# Altium PCB STM32 PCB.PcbDoc (part 1 of 2)
Units mm, origin at the board's own origin, x right, y up, seen from the top; angles counter-clockwise.
Board outline 53.53 x 23.03 mm, 2 copper layers (Top Layer, Bottom Layer); 33 components, 50 nets, 169 pads, 215 vias.
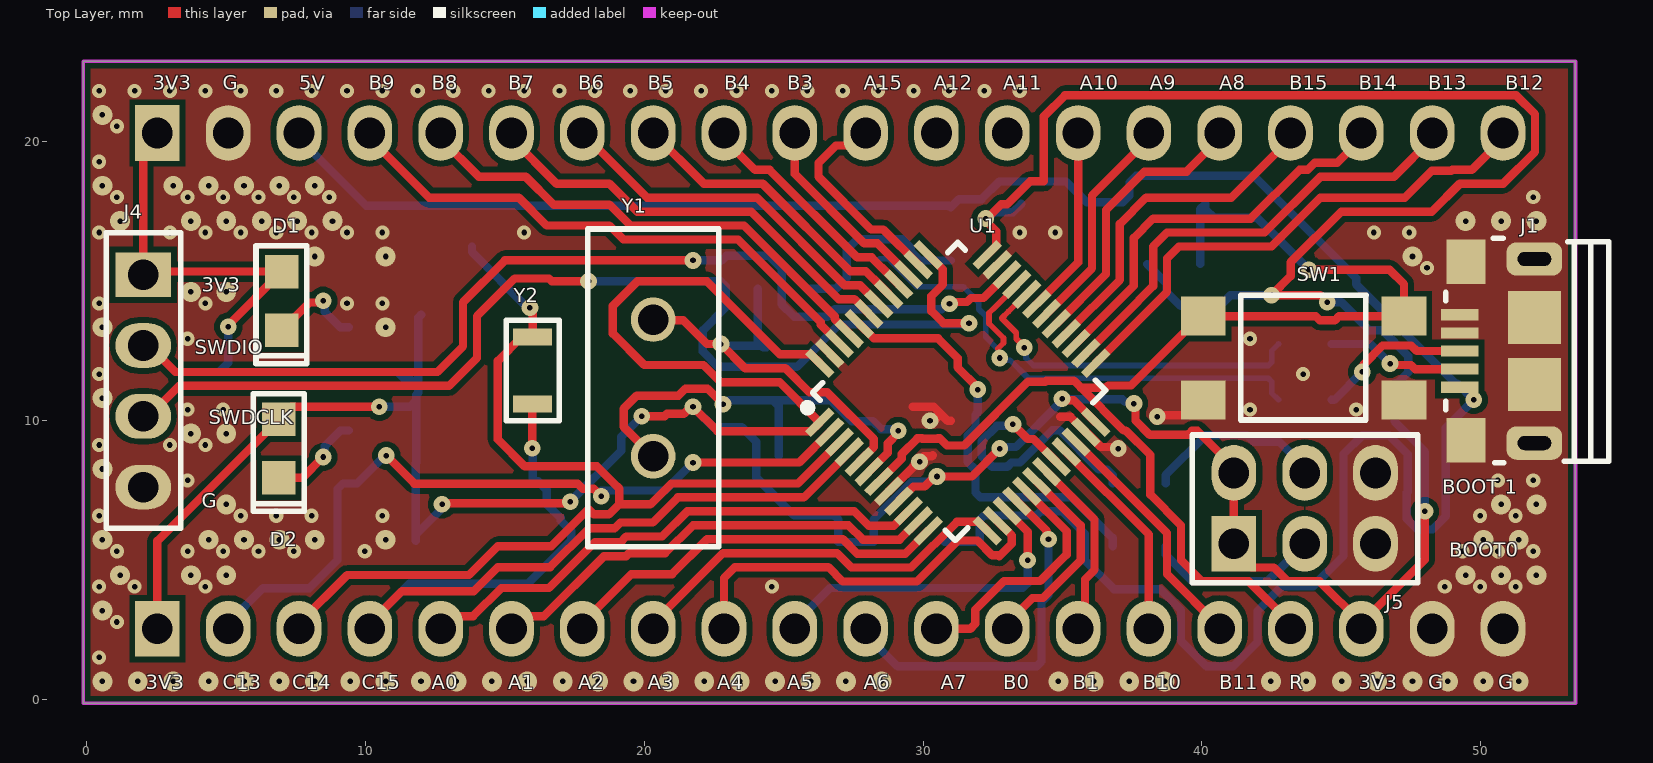
[diagram p0: Top Layer view]
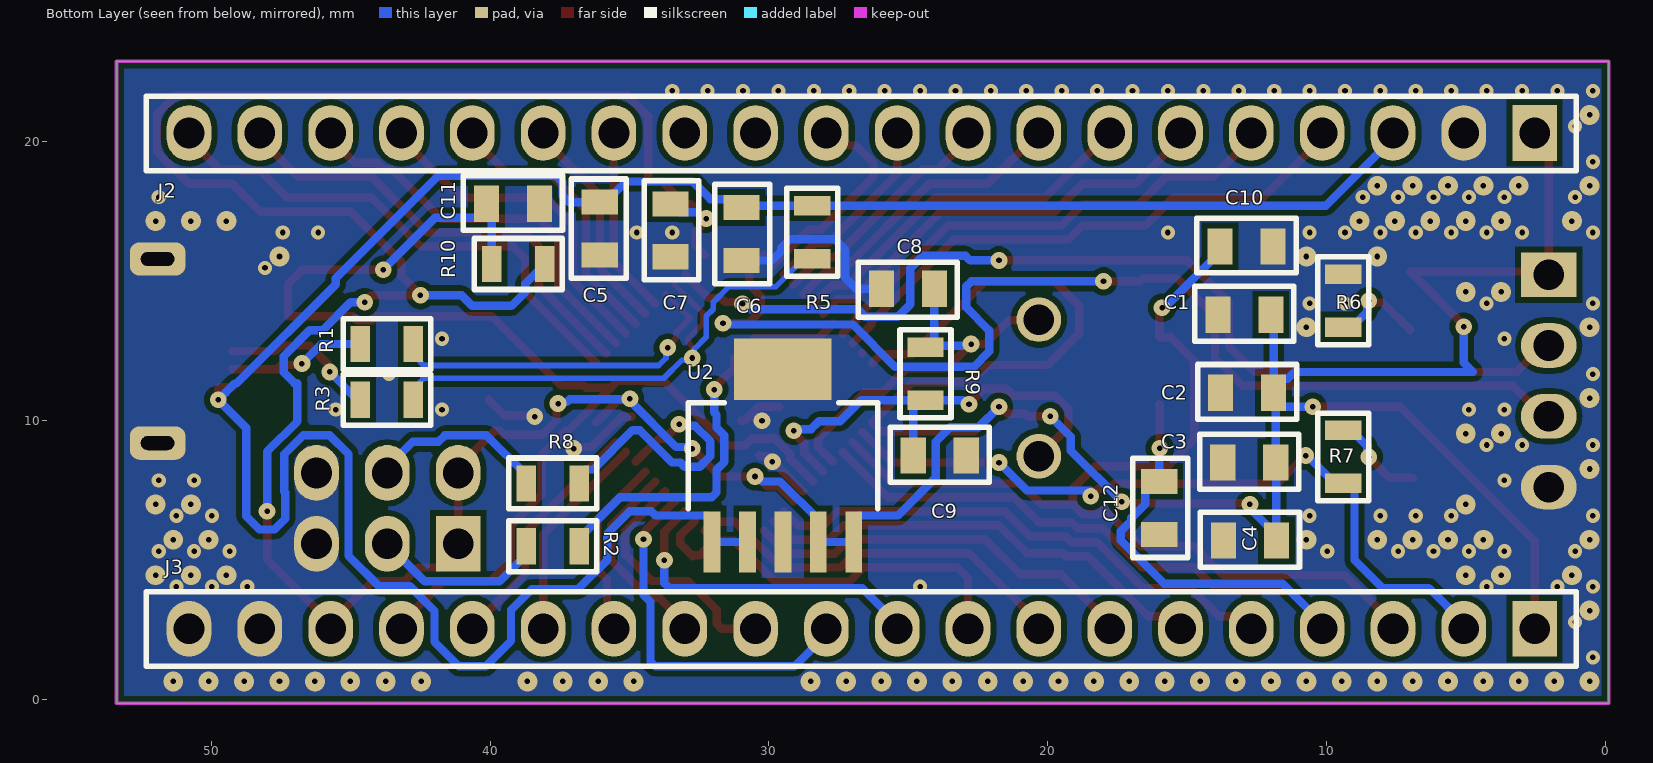
[diagram p1: Bottom Layer view, seen from below]
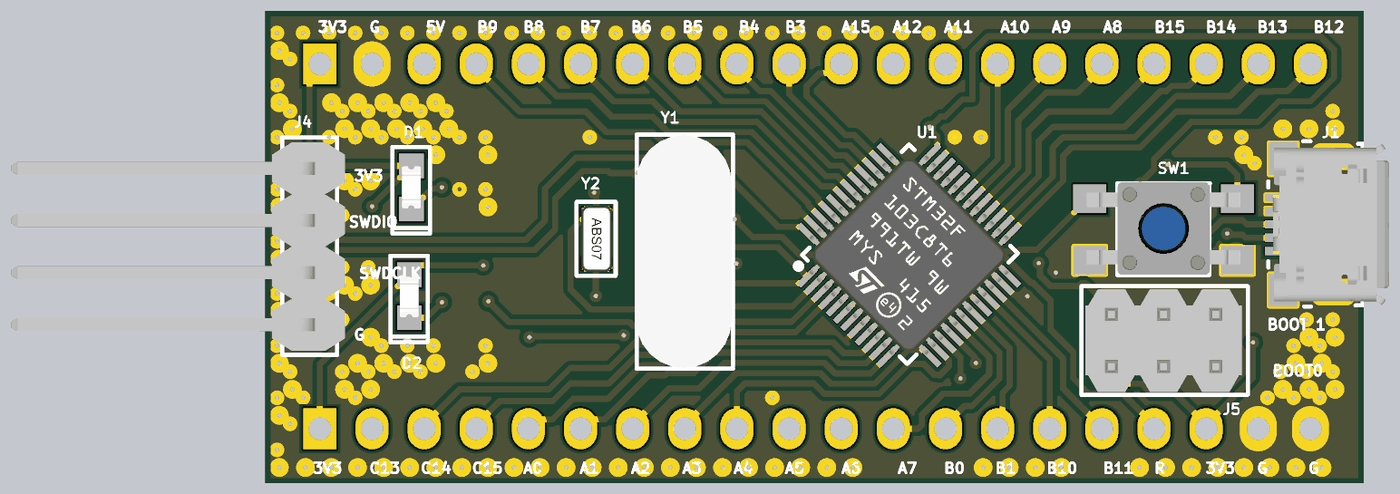
[diagram p2: 3D render of the assembled board from above, using the file's embedded part models]
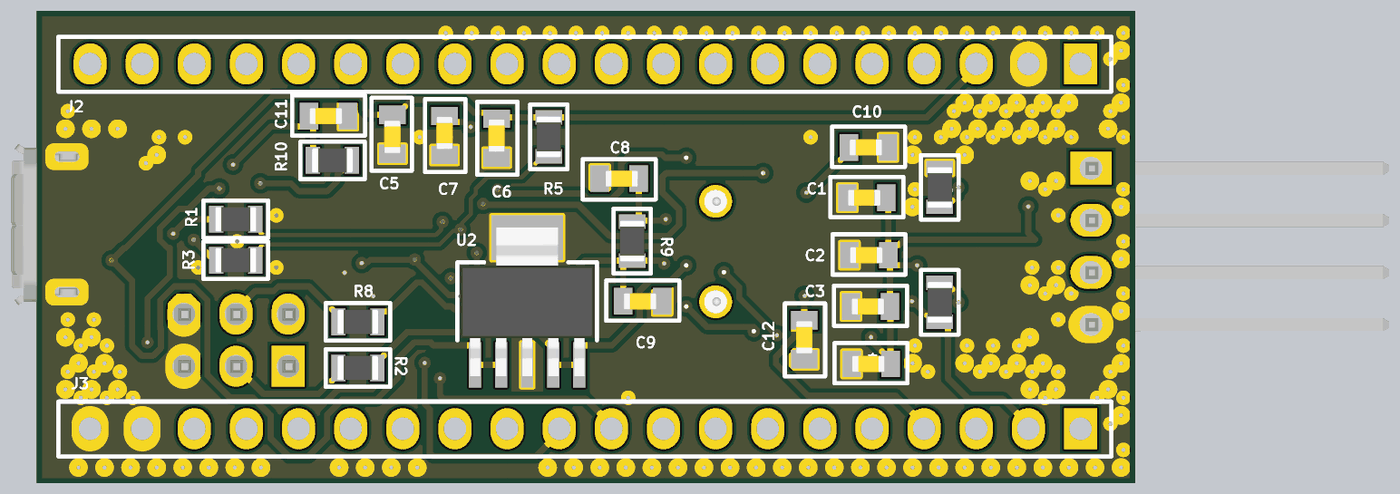
[diagram p3: 3D render of the assembled board from below, using the file's embedded part models]

## Layer stack, top to bottom
Top Solder: solder mask 0.0102, Solder Resist, Dk 3.5
Top Layer: signal copper 0.0356
Dielectric 1: dielectric 0.32, FR-4, Dk 4.8
Bottom Layer: signal copper 0.0356
Bottom Solder: solder mask 0.0102, Solder Resist, Dk 3.5

## Board outline
-0.127,-0.127 53.4,-0.127 53.4,22.9 -0.127,22.9

## Design rules (kind name [scope] priority, off if disabled: settings)
Clearance [All] p1: gap=0.2 ignorepadtopadclearanceinfootprint=FALSE
ComponentClearance [All] p1: gap=0.2 collisioncheckmode=3 verticalgap=0.2 showdistances=FALSE
DiffPairsRouting DiffPair_90DiffPairsRouting [InDifferentialPairClass('diff_90')] p1: maxlimit=0.254 minlimit=0.254 mostfreqgap=0.254 toplayer_minwidth=0.203 toplayer_maxwidth=0.203 toplayer_prefwidth=0.203 bottomlayer_minwidth=0.203 bottomlayer_maxwidth=0.203 bottomlayer_prefwidth=0.203 maxuncoupledlength=12.7
DiffPairsRouting [All] p2: maxlimit=0.254 minlimit=0.254 mostfreqgap=0.254 toplayer_minwidth=0.381 toplayer_maxwidth=0.381 toplayer_prefwidth=0.381 bottomlayer_minwidth=0.381 bottomlayer_maxwidth=0.381 bottomlayer_prefwidth=0.381 maxuncoupledlength=12.7
HoleSize [All] p1: absolutevalues=TRUE maxlimit=10 minlimit=0.2 maxpercent=80.000 minpercent=20.000
HoleToHoleClearance [All] p1: gap=0.3 allowstackedmicrovias=TRUE
MatchedLengths DiffPair_90MatchedLengths [InDifferentialPairClass('diff_90')] p1: tolerance=25.4 checknetsindiffpair=FALSE checkdiffpairvsdiffpair=TRUE checkxsignals=TRUE checkothers=TRUE
MinimumSolderMaskSliver [All] p1: minsoldermaskwidth=0.1
PolygonConnect [All] p1: connectstyle=Direct reliefconductorwidth=0.254 reliefentries=4 polygonreliefangle="90 Angle" airgapwidth=0.254
RoutingVias [All] p1: holewidth=0.3 width=0.6 viastyle="Through Hole" minholewidth=0.1 minwidth=0.2 maxholewidth=0.3 maxwidth=7
SilkToSilkClearance [All] p1: silktosilkclearance=0.1
SilkToSolderMaskClearance [IsPad] p1: minsilkscreentomaskgap=0.1 clearancetoexposedcopper=TRUE
SolderMaskExpansion [All] p1: expansion=0.1 istentingtop=FALSE
Width [All] p1: maxlimit=0.5 minlimit=0.3 preferedwidth=0.3
23 further rules are at their usual default settings.

## Classes and differential pairs
differential pair class diff_90: D
differential pair D: +D_P -D_N

## Components (designator, comment, footprint, x,y, rotation, side; value= is the part's Value field where it differs from the comment)
C1 "10uF" CAP_100_NF 13.077,13.8 r0 bottom
C2 "10uF" CAP_100_NF 12.977,11 r0 bottom
C3 "10uF" CAP_100_NF 12.9,8.5 r0 bottom
C4 "10uF" CAP_100_NF 12.877,5.7 r0 bottom
C5 "10uF" CAP_100_NF 36.068,16.764 r270 bottom
C6 "10uF" CAP_100_NF 30.988,16.825 r90 bottom
C7 "10uF" CAP_100_NF 33.528,16.957 r90 bottom
C8 "22pF" CAP_100_NF 24.892,14.732 r180 bottom
C9 "22pF" CAP_100_NF 24,8.75 r0 bottom
C10 "22pF" CAP_100_NF 13,16.25 r0 bottom
C11 "100_nf" CAP_100_NF 39.309,17.78 r0 bottom
C12 "22pF" CAP_100_NF 16,7 r90 bottom
D1 "red" LED_RED_0805 7,14.3 r90 top
D2 "red" LED_RED_0805 6.9,9 r90 top
J1 "10118193-0001LF" USB 49.25,11.2 r90 top
J2 "PRPC020SACN-RC" "HDR MALE 20X1 2.54 MM" 2.54,20.32 r270 bottom
J3 "PRPC020SACN-RC" "HDR MALE 20X1 2.54 MM" 2.54,2.54 r270 bottom
J4 "PBC04SBEN" "HDR MALE 4X1 2.54 MM" 2.032,15.24 r0 top
J5 "PREC003DFAN-RC" HDR_MALE_3X2_2.54MM 41.148,5.588 r90 top
R1 "22 Ohm" R0805 43.7,12.75 r180 bottom
R2 "10K" R0805 37.75,5.5 r0 bottom
R3 "22 Ohm" R0805 43.7,10.75 r180 bottom
R5 "4.7K" R0805 28.448,16.764 r90 bottom
R6 "1K" R0805 9.4,14.3 r90 bottom
R7 "1K" R0805 9.4,8.7 r90 bottom
R8 "10K" R0805 37.75,7.75 r0 bottom
R9 "10 M Ohm" R0805 24.384,11.684 r270 bottom
R10 "10K" R0805 38.989,15.621 r180 bottom
SW1 "TL3305AF160QG" SW_PB_SMD 43.65,12.25 r180 top
U1 "STM32F103C8T6" STM32F103C8T6 31.245,11.004 r45 top
U2 "TL1963A-33DCQR" DCQR_PDSO_G6 29.5,8.75 r90 bottom
Y1 "ECS-80-20-4X" XTAL_8_MHZ 20.32,11.176 r270 top
Y2 "ABS07-32.768KHZ-6-T" "XTAL_32.768 KHZ_SMD" 16,11.8 r270 top

## Footprints (in the part's own frame and the unit in brackets; to place one, negate y for a bottom-side part, rotate by r counter-clockwise, add the part's x,y. Pads: shape width x height; smd on the part's side, far side on the other; paste and mask are expansions set on the pad)
CAP_100_NF [mm]
  rect 0.9x1.3 smd: 1(-1.077,0) 2(0.823,0)
  silkscreen extent -1.9,-1.02 1.65,0.95, body extent -0.8,-0.4 0.8,0.4, height 0.87
DCQR_PDSO_G6 [mm]
  rect 2.2x0.6 smd: 1(-3.1,2.54) 2(-3.1,1.27) 3(-3.1,0) 4(-3.1,-1.27) 5(-3.1,-2.54)
  rect 2.2x3.5 smd: 6(3.1,0)
  silkscreen extent -1.9,-3.4 1.9,3.4, body extent -3.66,-3.27 3.6,3.27, height 1.81
"HDR MALE 4X1 2.54 MM" [mm]
  rect 2x1.6 hole 1.1: 1(0,0)
  oval 2x1.6 hole 1.1: 2(0,-2.54) 3(0,-5.08) 4(0,-7.62)
  silkscreen extent -1.33,-9.1 1.35,1.5, body extent -14.53,-8.9 1.73,1.26, height 4.39
"HDR MALE 20X1 2.54 MM" [mm]
  rect 2x1.6 hole 1.1: 1(0,0)
  oval 2x1.6 hole 1.1: 2(0,-2.54) 3(0,-5.08) 4(0,-7.62) 5(0,-10.16) 6(0,-12.7) 7(0,-15.24) 8(0,-17.78) 9(0,-20.32) 10(0,-22.86) 11(0,-25.4) 12(0,-27.94) 13(0,-30.48) 14(0,-33.02) 15(0,-35.56) 16(0,-38.1) 17(0,-40.64) 18(0,-43.18) 19(0,-45.72) 20(0,-48.26)
  silkscreen extent -1.33,-49.8 1.35,1.5, body extent -1.14,-49.5 1.4,1.3, height 10.64
HDR_MALE_3X2_2.54MM [mm]
  rect 2x1.6 hole 1.1: 1(0,0)
  oval 2x1.6 hole 1.1: 2(0,-2.54) 3(0,-5.08) 4(2.54,-5.08) 5(2.54,-2.54) 6(2.54,0)
  silkscreen extent -1.4,-6.6 3.9,1.5, body extent -1.25,-6.31 3.75,1.31, height 10.59
LED_RED_0805 [mm]
  rect 1.2x1.2 smd: 1(-1.05,0) 2(1.05,0)
  silkscreen extent -2.25,-0.9 1.97,0.92, body extent -1.03,-0.45 1.03,0.46, height 1.1
R0805 [mm]
  rect 0.7x1.3 smd: 1(-0.95,0) 2(0.95,0)
  silkscreen extent -1.57,-0.91 1.57,0.91, body extent -1,-0.6 1,0.6, height 0.71
STM32F103C8T6 [mm]
  rect 1.2x0.3 smd paste+0 mask+0.05: 1(-4.25,2.75) 2(-4.25,2.25) 3(-4.25,1.75) 4(-4.25,1.25) 5(-4.25,0.75) 6(-4.25,0.25) 7(-4.25,-0.25) 8(-4.25,-0.75) 9(-4.25,-1.25) 10(-4.25,-1.75) 11(-4.25,-2.25) 12(-4.25,-2.75) 25(4.25,-2.75) 26(4.25,-2.25) 27(4.25,-1.75) 28(4.25,-1.25) 29(4.25,-0.75) 30(4.25,-0.25) 31(4.25,0.25) 32(4.25,0.75) 33(4.25,1.25) 34(4.25,1.75) 35(4.25,2.25) 36(4.25,2.75)
  rect 0.3x1.2 smd paste+0 mask+0.05: 13(-2.75,-4.25) 14(-2.25,-4.25) 15(-1.75,-4.25) 16(-1.25,-4.25) 17(-0.75,-4.25) 18(-0.25,-4.25) 19(0.25,-4.25) 20(0.75,-4.25) 21(1.25,-4.25) 22(1.75,-4.25) 23(2.25,-4.25) 24(2.75,-4.25) 37(2.75,4.25) 38(2.25,4.25) 39(1.75,4.25) 40(1.25,4.25) 41(0.75,4.25) 42(0.25,4.25) 43(-0.25,4.25) 44(-0.75,4.25) 45(-1.25,4.25) 46(-1.75,4.25) 47(-2.25,4.25) 48(-2.75,4.25)
  silkscreen extent -4.32,-3.68 3.81,3.81, body extent -4.5,-4.5 4.5,4.5, height 1.55
SW_PB_SMD [mm]
  rect 1.6x1.4 smd: 1(-3.6,1.5) 2(3.6,1.5) 3(-3.6,-1.5) 4(3.6,-1.5)
  silkscreen extent -2.25,-2.25 2.25,2.22, body extent -3.75,-2.3 3.75,2.2, height 4
USB [mm]
  rect 0.4x1.35 smd mask+0.05: 1(0,0) 2(0.65,0) 3(1.3,0) 4(1.95,0) 5(2.6,0)
  rect 1.6x1.4 smd: 6(-1.9,-0.225) 7(4.5,-0.225)
  rrect60% 1.2x2 hole 0.5 slot 1.2 at 90 deg mask+0.05: 8(-2,-2.675) 9(4.6,-2.675)
  rect 1.9x1.9 smd: 10(0.1,-2.675) 11(2.5,-2.675)
  silkscreen extent -2.7,-5.35 5.35,0.5, body extent -2.63,-5.38 5.23,0.28, height 2.87
XTAL_8_MHZ [mm]
  round 1.6 / inner round 1 / far side round 1.6 hole 1.1: 1(-2.45,0) 2(2.45,0)
  silkscreen extent -5.7,-2.35 5.7,2.35, body extent -5.68,-2.37 5.68,2.27, height 4.01
"XTAL_32.768 KHZ_SMD" [mm]
  rect 0.6x1.4 smd: 1(-1.2,0) 2(1.2,0)
  silkscreen extent -1.8,-0.95 1.8,0.95, body extent -1.61,-0.73 1.61,0.79, height 0.92

## Part data
C1 C2 C3 C4 C5 C6 C7: library part "CAP 10 UF", "Cap Ceramic 10uF 16V X7S 10% Pad SMD 0805 Soft Termination 125C Automotive T/R", Manufacturer=Samsung, Manufacturer Part Number=CL21Y106KOQ4PNE, Supplier Part Number 1=1276-CL21Y106KOQ4PNECT-ND, Category="Ceramic Capacitors", Pricing 1="1=0.50000, 10=0.34800, 50=0.24340, 100=0.20860, 500=0.15646, 1000=0.13213 (USD)", RoHS=Yes, RoHS Compliant=Yes, Stock 1=1111, Supplier 1=Digi-Key
C8 C9 C10 C12: library part CAP_22pF, "Cap Ceramic 22pF 50V C0G 0.25pF SMD 0805 125°C Paper T/R", Case Code (Imperial)=0805, Case Code (Metric)=2012, Dielectric=C0G, Dielectric Material=Ceramic, Manufacturer=KEMET, Manufacturer Part Number=C0805C220C5GACTU, Max Operating Temperature=125°C, Min Operating Temperature=-55°C, Package Quantity=4000, Supplier Part Number 1=80-C0805C220C5G, Voltage Rating=50V, Capacitance=22pF, Case/Package=0805, Category="Ceramic Capacitors", ComponentLink1Description=https://datasheet.ciiva.com/5420/kem-c1003-c0g-smd-356956-5420078.pdf?src-supplier=Mouser, ComponentLink1URL=https://datasheet.ciiva.com/5420/kem-c1003-c0g-smd-356956-5420078.pdf?src-supplier=Mouser, Dissipation Factor=0.1%, Height=0.78mm, Lead Free="Lead Free", Lead Pitch=0.75mm, Length=0.079inch, Mount="Surface Mount", Packaging="Tape and Reel", Pricing 1="1=0.91000, 10=0.56400, 50=0.56400, 100=0.46200, 1000=0.32200, 10000=0.28100 (USD)", RoHS=Yes, RoHS Compliant=Yes, Series=C0805C, Stock 1=504, Supplier 1=Mouser, Termination=SMD/SMT, Thickness=0.035inch, Voltage Rating (DC)=50V, Width=0.049inch
C11: library part "CAP_ 0.1uf", "Cap Ceramic 0.1uF 50V X7R 10% SMD 0805 125°C Blister Plastic T/R", Capacitance=100nF, Case Code (Imperial)=0805, Case Code (Metric)=2012, Dielectric=X7R, Manufacturer=TDK, Manufacturer Part Number=C2012X7R1H104K125AE, Max Operating Temperature=125°C, Min Operating Temperature=-55°C, Package Quantity=2000, Supplier Part Number 1=810-C2012X7R1H104KAE, Tolerance=10%, Voltage Rating=50V, Case/Package=0805, Category="Ceramic Capacitors", ComponentLink1Description=https://datasheet.ciiva.com/29534/mlcc-commercial-soft-en-29534235.pdf?src-supplier=Digi-Key, ComponentLink1URL=https://datasheet.ciiva.com/29534/mlcc-commercial-soft-en-29534235.pdf?src-supplier=Digi-Key, Features="Soft Termination", Height=1.25mm, Length=0.079inch, Mount="Surface Mount", Packaging="Tape and Reel", Pricing 1="1=0.25000, 10=0.11500, 50=0.11500, 100=0.09800, 1000=0.06100, 10000=0.05200 (USD)", RoHS=Yes, RoHS Compliant=Yes, Stock 1=49203, Supplier 1=Mouser, Termination=SMD/SMT, Thickness=0.057inch, Voltage Rating (DC)=50V, Weight=0.000194oz, Width=0.049inch
D1 D2: library part LED_RED, "Led SMT Red 0805 Tape", Case Code (Imperial)=0805, Case Code (Metric)=2012, Color=Red, Forward Current=25mA, Forward Voltage=2.5V, Lens Color=White, Manufacturer="Osram Opto", Manufacturer Part Number=LSR976-NR-1, Max Operating Temperature=85°C, Min Operating Temperature=-30°C, Package Quantity=16000, Power Dissipation=65mW, Reverse Voltage=12V, Supplier Part Number 1=Q62702P5178, Test Current=20mA, Case/Package=0805, Category=LEDs, ComponentLink1Description=https://datasheet.ciiva.com/4688/o-ls-ly-r976-24152-4688435.pdf?src-supplier=Mouser, ComponentLink1URL=https://datasheet.ciiva.com/4688/o-ls-ly-r976-24152-4688435.pdf?src-supplier=Mouser, ComponentLink2Description=https://datasheet.ciiva.com/26920/getdatasheetpartid-568367-26920831.pdf?src-supplier=Verical, ComponentLink2URL=https://datasheet.ciiva.com/26920/getdatasheetpartid-568367-26920831.pdf?src-supplier=Verical, ComponentLink3Description=https://datasheet.ciiva.com/2112/00078896-0-2112782.pdf?src-supplier=Digi-Key, ComponentLink3URL=https://datasheet.ciiva.com/2112/00078896-0-2112782.pdf?src-supplier=Digi-Key, ComponentLink4Description=https://datasheet.ciiva.com/2112/00078896-0-2112781.pdf?src-supplier=Digi-Key, ComponentLink4URL=https://datasheet.ciiva.com/2112/00078896-0-2112781.pdf?src-supplier=Digi-Key, ComponentLink5Description=https://datasheet.ciiva.com/2112/00078896-0-2112783.pdf?src-supplier=Digi-Key, ComponentLink5URL=https://datasheet.ciiva.com/2112/00078896-0-2112783.pdf?src-supplier=Digi-Key, Depth=1.35mm, Dominant Wavelength=633nm, Height=0.9mm, Illumination Color=Red, Length=2.1mm, Lens Size=1.25mm, Lens Style=Flat,Diffused,Colorless,Rectangular, Lens Transparency=Diffused, Luminous Flux=0.47lm, Luminous Intensity=180mcd, Mount="Surface Mount", Number of Elements=1, Number of LEDs=1, Number of Pins=2, Packaging="Tape and Reel", Pricing 1="4000=0.03250, 8000=0.03167, 16000=0.03084, 24000=0.03002, 32000=0.02919, 40000=0.02836, 400000=0.02753 (USD)", Radiation Hardening=No, RoHS=Yes, RoHS Compliant=Yes, Series="CHIPLED 0805", Stock 1=360000, Supplier 1=Avnet, Viewing Angle=160°, Width=1.25mm
J1: library part Micro_USB, "FCI Right Angle Surface Mount Mount Female USB Connector; 100 V ac; 1.8A", Manufacturer="Amphenol ICC / FCI", Supplier Part Number 1=8632989, Category="USB Connectors", ComponentLink1Description=http://uk.rs-online.com/webdocs/1450/0900766b814507f1.pdf?src-supplier=RSComponents, ComponentLink1URL=http://uk.rs-online.com/webdocs/1450/0900766b814507f1.pdf?src-supplier=RSComponents, ComponentLink2Description=http://www.amphenol-icc.com/media/wysiwyg/files/drawing/10118193.pdf?src-supplier=Digi-Key, ComponentLink2URL=http://www.amphenol-icc.com/media/wysiwyg/files/drawing/10118193.pdf?src-supplier=Digi-Key, ComponentLink3Description=https://cdn.amphenol-icc.com/media/wysiwyg/files/documentation/datasheet/inputoutput/io_usb_micro.pdf?src-supplier=Digi-Key, ComponentLink3URL=https://cdn.amphenol-icc.com/media/wysiwyg/files/documentation/datasheet/inputoutput/io_usb_micro.pdf?src-supplier=Digi-Key, ComponentLink4Description=https://cdn.amphenol-icc.com/media/wysiwyg/files/documentation/datasheet/inputoutput/io_usb_micro.pdf?src-supplier=Mouser, ComponentLink4URL=https://cdn.amphenol-icc.com/media/wysiwyg/files/documentation/datasheet/inputoutput/io_usb_micro.pdf?src-supplier=Mouser, ComponentLink5Description=https://cdn.amphenol-icc.com/media/wysiwyg/files/documentation/datasheet/inputoutput/io_usb_micro.pdf?src-supplier=Onlinecomponents.com, ComponentLink5URL=https://cdn.amphenol-icc.com/media/wysiwyg/files/documentation/datasheet/inputoutput/io_usb_micro.pdf?src-supplier=Onlinecomponents.com, ComponentLink6Description=https://cdn.amphenol-icc.com/media/wysiwyg/files/documentation/datasheet/inputoutput/io_usb_micro.pdf?src-supplier=Allied+Electronics, ComponentLink6URL=https://cdn.amphenol-icc.com/media/wysiwyg/files/documentation/datasheet/inputoutput/io_usb_micro.pdf?src-supplier=Allied+Electronics, ComponentLink7Description=https://cdn.amphenol-icc.com/media/wysiwyg/files/documentation/datasheet/inputoutput/io_usb_micro.pdf?src-supplier=RSComponents, ComponentLink7URL=https://cdn.amphenol-icc.com/media/wysiwyg/files/documentation/datasheet/inputoutput/io_usb_micro.pdf?src-supplier=RSComponents, ComponentLink8Description=https://cdn.amphenol-icc.com/media/wysiwyg/files/documentation/datasheet/inputoutput/io_usb_micro.pdf?src-supplier=Verical, ComponentLink8URL=https://cdn.amphenol-icc.com/media/wysiwyg/files/documentation/datasheet/inputoutput/io_usb_micro.pdf?src-supplier=Verical, ComponentLink9Description=https://cdn.amphenol-icc.com/media/wysiwyg/files/documentation/datasheet/inputoutput/io_usb_micro.pdf?src-supplier=Avnet, ComponentLink9URL=https://cdn.amphenol-icc.com/media/wysiwyg/files/documentation/datasheet/inputoutput/io_usb_micro.pdf?src-supplier=Avnet, ComponentLink10Description=https://cdn.amphenol-icc.com/media/wysiwyg/files/documentation/datasheet/inputoutput/io_usb_micro.pdf?src-supplier=Arrow+Electronics, ComponentLink10URL=https://cdn.amphenol-icc.com/media/wysiwyg/files/documentation/datasheet/inputoutput/io_usb_micro.pdf?src-supplier=Arrow+Electronics, ComponentLink11Description=https://cdn.amphenol-icc.com/media/wysiwyg/files/documentation/datasheet/inputoutput/io_usb_micro.pdf?src-supplier=TTI, ComponentLink11URL=https://cdn.amphenol-icc.com/media/wysiwyg/files/documentation/datasheet/inputoutput/io_usb_micro.pdf?src-supplier=TTI, ComponentLink12Description=https://cdn.amphenol-icc.com/media/wysiwyg/files/documentation/datasheet/inputoutput/io_usb_micro.pdf?src-supplier=Heilind+Electronics, ComponentLink12URL=https://cdn.amphenol-icc.com/media/wysiwyg/files/documentation/datasheet/inputoutput/io_usb_micro.pdf?src-supplier=Heilind+Electronics, ComponentLink13Description=https://cdn.amphenol-icc.com/media/wysiwyg/files/documentation/datasheet/inputoutput/io_usb_micro.pdf?src-supplier=TME, ComponentLink13URL=https://cdn.amphenol-icc.com/media/wysiwyg/files/documentation/datasheet/inputoutput/io_usb_micro.pdf?src-supplier=TME, Manufacturer Part Number=10118193-0001LF, Pricing 1="100=0.34100, 500=0.29900, 1000=0.25600, 2500=0.23900, 5000=0.22100 (USD)", RoHS=No, Stock 1=3200, Supplier 1=RSComponents
J2 J3: library part MALE_HEADER_20X1, "Conn Header Vert 20POS 2.54MM", Color=Black, Manufacturer=Sullins, Package Quantity=1, Supplier Part Number 1=S1131EC-20-ND, Category=Connectors, ComponentLink1Description=https://datasheet.ciiva.com/741/xrxczzzsxxn-rc-st-11635-b-741945.pdf?src-supplier=Digi-Key, ComponentLink1URL=https://datasheet.ciiva.com/741/xrxczzzsxxn-rc-st-11635-b-741945.pdf?src-supplier=Digi-Key, Connector Type="Male Pin", Contact Mating Length=0.23inch, Contact Plating=Gold, Contact Type="Male Pin", Manufacturer Part Number=PRPC020SACN-RC, Mount="Through Hole", Number of Positions=20, Number of Rows=1, Packaging=Bulk, Pitch=0.1inch, Pricing 1="1=0.67000, 10=0.62800, 25=0.56520, 50=0.50260, 100=0.48160, 250=0.43976, 500=0.41880 (USD)", RoHS=Yes, RoHS Compliant=Yes, Series=-, Stock 1=612, Supplier 1=Digi-Key, Termination=Solder
J4: library part HDR_MALE_4X1, "Conn Header R/a 4POS 2.54MM", Color=Black, Manufacturer=Sullins, Package Quantity=1, Supplier Part Number 1=S1151E-04-ND, Category=Connectors, ComponentLink1Description=http://www.sullinscorp.com/catalogs/77_PAGE108-109_.100_MALE_HDR.pdf?src-supplier=Digi-Key, ComponentLink1URL=http://www.sullinscorp.com/catalogs/77_PAGE108-109_.100_MALE_HDR.pdf?src-supplier=Digi-Key, Connector Type="Male Pin", Contact Material=Bronze, Contact Mating Length=0.23inch, Contact Plating=Gold, Contact Type="Male Pin", Gender=Male, Height=3.56mm, Housing Color=Black, Housing Material=Plastic, Lead Free="Lead Free", Length=10.2mm, Manufacturer Part Number=PBC04SBEN, Mount="Through Hole", Number of Contacts=4, Number of Positions=4, Number of Rows=1, Packaging=Bulk, Pitch=0.1inch, Pricing 1="1=0.84000, 10=0.73800, 25=0.69440, 50=0.66540, 100=0.63650, 250=0.57868, 500=0.52080 (USD)", RoHS=Yes, RoHS Compliant=Yes, Stock 1=668, Supplier 1=Digi-Key, Termination=Solder, Width=2.54mm
J5: library part HDR_MALE_3X2, "Conn Header Vert 6POS 2.54MM", Color=Black, Manufacturer=Sullins, Package Quantity=1, Supplier Part Number 1=S2212EC-03-ND, Category=Connectors, ComponentLink1Description=https://datasheet.ciiva.com/741/xrxczzzdxxn-rc-11636-b-741002.pdf?src-supplier=Digi-Key, ComponentLink1URL=https://datasheet.ciiva.com/741/xrxczzzdxxn-rc-11636-b-741002.pdf?src-supplier=Digi-Key, Connector Type="Male Pin", Contact Mating Length=0.318inch, Contact Plating=Tin, Contact Type="Male Pin", Manufacturer Part Number=PREC003DFAN-RC, Mount="Through Hole", Number of Positions=6, Number of Rows=2, Packaging=Bulk, Pitch=0.1inch, Pricing 1="1=0.16000, 10=0.15100, 25=0.12920, 50=0.11280, 100=0.10480, 250=0.09272, 500=0.08870 (USD)", RoHS=Yes, RoHS Compliant=Yes, Row Spacing=0.1inch, Stock 1=4091, Supplier 1=Digi-Key, Termination=Solder
R1 R3: library part "Res 22Ohm", "贴片电阻 22Ω ± 1.00% 0.125W ± 100ppm/℃ 0805", Case Code (Imperial)=0805, Case Code (Metric)=2012, Manufacturer=Yageo, Manufacturer Part Number=RC0805FR-0722RL, Max Operating Temperature=155°C, Max Power Dissipation=125mW, Min Operating Temperature=-55°C, Package Quantity=1, Resistance=22R, Resistance Tolerance=1%, Resistor Type="Thick Film", Supplier Part Number 1=6183987, Temperature Coefficient=100ppm/°C, Voltage Rating=150V, Case/Package=0805, Category="Chip SMD Resistors", ComponentLink1Description=https://datasheet.ciiva.com/11819/0900766b8106beab-11819837.pdf?src-supplier=RSComponents, ComponentLink1URL=https://datasheet.ciiva.com/11819/0900766b8106beab-11819837.pdf?src-supplier=RSComponents, ComponentLink2Description=https://datasheet.ciiva.com/46447/444164-46447574.pdf?src-supplier=Element14, ComponentLink2URL=https://datasheet.ciiva.com/46447/444164-46447574.pdf?src-supplier=Element14, ComponentLink3Description=https://datasheet.ciiva.com/2457/pyu-r-int-thick-7-2457045.pdf?src-supplier=Digi-Key, ComponentLink3URL=https://datasheet.ciiva.com/2457/pyu-r-int-thick-7-2457045.pdf?src-supplier=Digi-Key, ComponentLink4Description=https://datasheet.ciiva.com/2457/pyu-r-int-thick-7-2457046.pdf?src-supplier=Digi-Key, ComponentLink4URL=https://datasheet.ciiva.com/2457/pyu-r-int-thick-7-2457046.pdf?src-supplier=Digi-Key, ComponentLink5Description=https://datasheet.ciiva.com/2457/pyu-r-int-thick-7-2457044.pdf?src-supplier=Digi-Key, ComponentLink5URL=https://datasheet.ciiva.com/2457/pyu-r-int-thick-7-2457044.pdf?src-supplier=Digi-Key, ComponentLink6Description=https://datasheet.ciiva.com/12667/rc0805-12667371.pdf?src-supplier=Mouser, ComponentLink6URL=https://datasheet.ciiva.com/12667/rc0805-12667371.pdf?src-supplier=Mouser, Construction=Rectangular, Depth=1.25mm, Features="Moisture Resistant", Height=0.024inch, Lead Free="Lead Free", Length=0.079inch, Military Standard=Not, Number of Terminations=2, Packaging="Tape and Reel", Power Rating=125mW, Pricing 1="5000=0.01300 (USD)", REACH SVHC=Unknown, RoHS=Yes, RoHS Compliant=Yes, Series=RC, Stock 1=50000, Supplier 1=RSComponents, Technology="THICK FILM", Termination=SMD/SMT, Tolerance=1%, Width=0.049inch, Working Voltage=150V
R2 R8 R10: library part Res_10K, "Res Thin Film 0805 10K Ohm 0.1% 1/8W ±50ppm/°C Molded SMD SMD Paper T/R", Case Code (Imperial)=0805, Case Code (Metric)=2012, Manufacturer=Yageo, Manufacturer Part Number=RT0805BRE0710KL, Max Operating Temperature=125°C, Max Power Dissipation=125mW, Min Operating Temperature=-55°C, Package Quantity=5000, Resistance=10kR, Resistor Type="Thin Film", Supplier Part Number 1=82AH9025, Temperature Coefficient=50ppm/°C, Voltage Rating=150V, Case/Package=0805, Category="Chip SMD Resistors", ComponentLink1Description=https://datasheet.ciiva.com/2591/pyu-rt-1-to-0-05-rohs-l-5-2591441.pdf?src-supplier=Digi-Key, ComponentLink1URL=https://datasheet.ciiva.com/2591/pyu-rt-1-to-0-05-rohs-l-5-2591441.pdf?src-supplier=Digi-Key, ComponentLink2Description=https://datasheet.ciiva.com/12836/pyu-rt-1-to-0-05-rohs-l-4-12836453.pdf?src-supplier=Mouser, ComponentLink2URL=https://datasheet.ciiva.com/12836/pyu-rt-1-to-0-05-rohs-l-4-12836453.pdf?src-supplier=Mouser, Contact Plating=Tin,Matte, Features="Moisture Resistant", Height=0.024inch, Lead Free="Lead Free", Length=0.079inch, Number of Terminations=2, Packaging="Tape and Reel", Power Rating=125mW, Pricing 1="10=0.27000, 25=0.21800, 50=0.16600, 100=0.11400 (USD)", Radiation Hardening=No, RoHS=Yes, RoHS Compliant=Yes, Series=RT, Size Code=0805, Stock 1=9400, Supplier 1=Newark, Termination=SMD/SMT, Voltage Rating (DC)=150V, Weight=0.000194oz, Width=0.049inch
R5: library part "Res 4.7 K", "Res Thick Film 0805 4.7K Ohm 1% 0.125W ±100ppm/°C Molded SMD Paper T/R", Case Code (Imperial)=0805, Case Code (Metric)=2012, Manufacturer="Stackpole Electronics", Manufacturer Part Number=RMCF0805FT4K70, Max Operating Temperature=155°C, Max Power Dissipation=125mW, Min Operating Temperature=-55°C, Resistance=4.7kR, Resistor Type="Thick Film", Temperature Coefficient=100ppm/°C, Tolerance=1%, Case/Package=0805, Category="Chip SMD Resistors", ComponentLink1Description=https://www.seielect.com/Catalog/SEI-RMCF_RMCP.pdf?src-supplier=Digi-Key, ComponentLink1URL=https://www.seielect.com/Catalog/SEI-RMCF_RMCP.pdf?src-supplier=Digi-Key, ComponentLink2Description=https://www.verical.com/server-webapp/html/getDatasheet?partID=409513&src-supplier=Verical, ComponentLink2URL=https://www.verical.com/server-webapp/html/getDatasheet?partID=409513&src-supplier=Verical, ComponentLink3Description=https://www.seielect.com/catalog/SEI-RMCF_RMCP.pdf?src-supplier=Avnet, ComponentLink3URL=https://www.seielect.com/catalog/SEI-RMCF_RMCP.pdf?src-supplier=Avnet, ComponentLink4Description=http://www.seielect.com/catalog/sei-rmc.pdf?src-supplier=Future+Electronics, ComponentLink4URL=http://www.seielect.com/catalog/sei-rmc.pdf?src-supplier=Future+Electronics, ComponentLink5Description=https://www.seielect.com/catalog/SEI-Packaging.pdf?src-supplier=Digi-Key, ComponentLink5URL=https://www.seielect.com/catalog/SEI-Packaging.pdf?src-supplier=Digi-Key, ComponentLink6Description=http://components.arrow.com/part/dataview/44988207S7163511N1174?src-supplier=Arrow+Electronics, ComponentLink6URL=http://components.arrow.com/part/dataview/44988207S7163511N1174?src-supplier=Arrow+Electronics, Construction=Rectangular, Contact Plating=Tin,Matte, Depth=1.25mm, Features="Automotive AEC-Q200", Height=0.026inch, Lead Free="Lead Free", Length=2mm, Military Standard=Not, Mount="Surface Mount", Number of Terminations=2, Packaging="Tape and Reel", Power Rating=125mW, Pricing 1="5000=0.00256, 10000=0.00252, 20000=0.00245, 30000=0.00239, 40000=0.00230, 50000=0.00225, 500000=0.00220 (USD)", Radiation Hardening=No, RoHS=Yes, RoHS Compliant=Yes, Series=RMCF, Size Code=0805, Stock 1=3000000, Supplier 1=Avnet, Supplier Part Number 1=RMCF0805FT4K70, Width=0.049inch
R6 R7: library part Res_1K, "Res Thick Film 0805 1K Ohm 1% 0.125W(1/8W) ±100ppm/C Pad SMD T/R", Case Code (Imperial)=0805, Case Code (Metric)=2012, Manufacturer=Yageo, Manufacturer Part Number=RC0805FR-071KP, Max Operating Temperature=155°C, Max Power Dissipation=125mW, Min Operating Temperature=-55°C, Resistance=1kR, Resistor Type="Thick Film", Supplier Part Number 1=603-RC0805FR-071KP, Temperature Coefficient=100ppm/°C, Tolerance=1%, Case/Package=0805, Category="Chip SMD Resistors", ComponentLink1Description=http://www.yageo.com.tw/exep/pages/download/literatures/PYu-R_INT-thick_7.pdf?src-supplier=Digi-Key, ComponentLink1URL=http://www.yageo.com.tw/exep/pages/download/literatures/PYu-R_INT-thick_7.pdf?src-supplier=Digi-Key, ComponentLink2Description=http://www.yageo.com/NewPortal/yageodocoutput?fileName=/pdf/R-Chip/PYu-RC_51_RoHS_P_0.pdf&src-supplier=Digi-Key, ComponentLink2URL=http://www.yageo.com/NewPortal/yageodocoutput?fileName=/pdf/R-Chip/PYu-RC_51_RoHS_P_0.pdf&src-supplier=Digi-Key, Features="Moisture Resistant", Height=0.024inch, Length=0.079inch, Number of Terminations=2, Packaging="Tape and Reel", Pricing 1="1=0.22000, 10=0.07500, 50=0.07500, 100=0.03100, 1000=0.01400, 10000=0.00900 (USD)", RoHS=Yes, RoHS Compliant=Yes, Stock 1=2868, Supplier 1=Mouser, Width=0.049inch
R9: library part "Res_10 M_Ohm", "贴片电阻 10000000Ω ± 1.00% 0.125W ± 100ppm/℃ 0805", Case Code (Imperial)=0805, Case Code (Metric)=2012, Manufacturer=Yageo, Manufacturer Part Number=RC0805FR-0710ML, Max Operating Temperature=155°C, Max Power Dissipation=125mW, Min Operating Temperature=-55°C, Resistance=10MR, Resistance Tolerance=1%, Resistor Type="Thick Film", Supplier Part Number 1=603-RC0805FR-0710ML, Temperature Coefficient=100ppm/°C, Voltage Rating=150V, Case/Package=0805, Category="Chip SMD Resistors", ComponentLink1Description=https://datasheet.ciiva.com/11819/0900766b8106beab-11819794.pdf?src-supplier=RSComponents, ComponentLink1URL=https://datasheet.ciiva.com/11819/0900766b8106beab-11819794.pdf?src-supplier=RSComponents, ComponentLink2Description=https://datasheet.ciiva.com/46447/444164-46447564.pdf?src-supplier=Element14, ComponentLink2URL=https://datasheet.ciiva.com/46447/444164-46447564.pdf?src-supplier=Element14, ComponentLink3Description=https://datasheet.ciiva.com/12667/rc0805-12667934.pdf?src-supplier=Mouser, ComponentLink3URL=https://datasheet.ciiva.com/12667/rc0805-12667934.pdf?src-supplier=Mouser, ComponentLink4Description=https://datasheet.ciiva.com/7941/444164-7941686.pdf?src-supplier=Element14, ComponentLink4URL=https://datasheet.ciiva.com/7941/444164-7941686.pdf?src-supplier=Element14, ComponentLink5Description=https://datasheet.ciiva.com/7941/444164-7941685.pdf?src-supplier=Element14, ComponentLink5URL=https://datasheet.ciiva.com/7941/444164-7941685.pdf?src-supplier=Element14, ComponentLink6Description=https://datasheet.ciiva.com/16741/rc0805-16741023.pdf?src-supplier=Future+Electronics, ComponentLink6URL=https://datasheet.ciiva.com/16741/rc0805-16741023.pdf?src-supplier=Future+Electronics, Construction=Rectangular, Depth=1.25mm, Features="Moisture Resistant", Height=0.5mm, Lead Free="Lead Free", Length=2mm, Military Standard=Not, Number of Pins=2, Number of Terminations=2, Packaging="Tape and Reel", Power Rating=125mW, Pricing 1="1=0.10000, 10=0.03900, 50=0.03900, 100=0.01600, 1000=0.00800, 2500=0.00700, 5000=0.00500, 10000=0.00400 (USD)", REACH SVHC=Unknown, RoHS=Yes, RoHS Compliant=Yes, Series=RC, Stock 1=4, Supplier 1=Mouser, Technology="THICK FILM", Termination=SMD/SMT, Tolerance=1%, Voltage Rating (DC)=150V, Width=1.25mm, Working Voltage=150V
SW1: library part SW_PB, "TL3305A Series SPST 12 V 4.5 x 4.5 mm 160 gf Top Actuated SMT Tactile Switch", Manufacturer=E-Switch, Supplier Part Number 1=84Y2774, Category="Tactile Switches", ComponentLink1Description=http://www.farnell.com/datasheets/2554191.pdf?src-supplier=Farnell, ComponentLink1URL=http://www.farnell.com/datasheets/2554191.pdf?src-supplier=Farnell, ComponentLink2Description=http://www.farnell.com/datasheets/2554191.pdf?src-supplier=Newark, ComponentLink2URL=http://www.farnell.com/datasheets/2554191.pdf?src-supplier=Newark, ComponentLink3Description=http://spec_sheets.e-switch.com/specs/P010468.pdf?src-supplier=Digi-Key, ComponentLink3URL=http://spec_sheets.e-switch.com/specs/P010468.pdf?src-supplier=Digi-Key, Manufacturer Part Number=TL3305AF160QG, Pricing 1="1=0.22100, 10=0.21500, 25=0.20400, 50=0.19400, 100=0.18500, 250=0.16800 (USD)", RoHS=Yes, Stock 1=12000, Supplier 1=Newark
U1: "IC MCU 32BIT 64KB FLASH 48LQFP", Case/Package=LQFP, Frequency=72MHz, Manufacturer=STMicroelectronics, Max Operating Temperature=85°C, Max Power Dissipation=363mW, Max Supply Voltage=3.6V, Min Operating Temperature=-40°C, Min Supply Voltage=2V, Package Quantity=1500, Supplier Part Number 1=59M2182, Address Bus Width=32b, Category=Microcontrollers, ComponentLink1Description=https://datasheet.ciiva.com/15122/getdatasheetpartid-69880-15122076.pdf?src-supplier=Verical, ComponentLink1URL=https://datasheet.ciiva.com/15122/getdatasheetpartid-69880-15122076.pdf?src-supplier=Verical, ComponentLink2Description=https://datasheet.ciiva.com/8054/1730126-8054942.pdf?src-supplier=Element14, ComponentLink2URL=https://datasheet.ciiva.com/8054/1730126-8054942.pdf?src-supplier=Element14, ComponentLink3Description=https://datasheet.ciiva.com/14100/pustm-arm-microcont-stm32f103-en-14100508.pdf?src-supplier=Distrelec, ComponentLink3URL=https://datasheet.ciiva.com/14100/pustm-arm-microcont-stm32f103-en-14100508.pdf?src-supplier=Distrelec, ComponentLink4Description=https://datasheet.ciiva.com/16210/cd00161566-16210248.pdf?src-supplier=Future+Electronics, ComponentLink4URL=https://datasheet.ciiva.com/16210/cd00161566-16210248.pdf?src-supplier=Future+Electronics, ComponentLink5Description=https://datasheet.ciiva.com/48687/001075658-da-01-en-mcu-64kb-mem-stm32f103c8t6-lqfp-48-stm-48687589.pdf?src-supplier=Conrad, ComponentLink5URL=https://datasheet.ciiva.com/48687/001075658-da-01-en-mcu-64kb-mem-stm32f103c8t6-lqfp-48-stm-48687589.pdf?src-supplier=Conrad, Core Architecture=ARM, Data Bus Width=32b, Density=64KB, Height=1.4mm, Interface=I2C,SPI,USB,CAN,USART, Lead Free="Lead Free", Length=7mm, Manufacturer Part Number=STM32F103C8T6, Max Frequency=72MHz, Memory Size=64KB, Memory Type=FLASH, Number of ADC Channels=10, Number of Bits=32, Number of I2C Channels=2, Number of I/Os=37, Number of Pins=48, Number of Programmable I/O=48, Number of PWM Channels=1, Number of SPI Channels=2, Number of Timers/Counters=3, Oscillator Type=Internal, Packaging=Tray, Peripherals="POR,PWM,WDT,DMA,Temp Sensor,I2C", Pricing 1="1=9.19000, 10=8.25000, 25=7.80000, 50=7.28000, 100=6.76000, 250=6.41000 (USD)", Radiation Hardening=No, RAM Size=20KB, REACH SVHC="No SVHC", RoHS=Yes, RoHS Compliant=Yes, Series=STM32F103C8, Supplier 1=Newark, Termination=SMD/SMT, Watchdog Timer=Yes, Weight=0.006349oz, Width=7mm
U2: library part "3V3 Regulator", "LDO Regulator Pos 3.3V 1.5A 6-Pin(5+Tab) SOT-223 T/R", Case/Package=SOT-223, Dropout Voltage=340mV, Input Bias Current=1mA, Manufacturer="Texas Instruments", Max Input Voltage=20V, Max Operating Temperature=125°C, Max Output Current=1.5A, Max Output Voltage=3.3V, Min Current Limit=1.6A, Min Input Voltage=2.1V, Min Operating Temperature=-40°C, Package Quantity=1, Supplier Part Number 1=595-TL1963A-33DCQR, Accuracy=3%, Category="Voltage Regulators - Linear", ComponentLink1Description=https://datasheet.ciiva.com/2046/tl1963a-2046162.pdf?src-supplier=Digi-Key, ComponentLink1URL=https://datasheet.ciiva.com/2046/tl1963a-2046162.pdf?src-supplier=Digi-Key, ComponentLink2Description=https://datasheet.ciiva.com/2046/tl1963a-2046161.pdf?src-supplier=Digi-Key, ComponentLink2URL=https://datasheet.ciiva.com/2046/tl1963a-2046161.pdf?src-supplier=Digi-Key, ComponentLink3Description=https://datasheet.ciiva.com/2046/tl1963a-2046163.pdf?src-supplier=Digi-Key, ComponentLink3URL=https://datasheet.ciiva.com/2046/tl1963a-2046163.pdf?src-supplier=Digi-Key, Contact Plating=Gold, Lead Free="Lead Free", Manufacturer Part Number=TL1963A-33DCQR, Min Output Voltage=3.3V, Number of Outputs=1, Number of Pins=6, Number of Regulators=1, Output Current=1.5A, Output Type=Fixed, Output Voltage=3.3V, Packaging="Tape and Reel", Polarity=Positive, Pricing 1="1=3.62000, 10=3.26000, 50=3.08000, 100=2.67000, 1000=1.99000, 10000=1.98000 (USD)", Quiescent Current=1mA, Radiation Hardening=No, RoHS=Yes, RoHS Compliant=Yes, Series=-, Supplier 1=Mouser
Y1: library part Xtal_8MHZ, "Crystal 8MHz ±30ppm (Tol) ±50ppm (Stability) 20pF FUND 80Ohm 2-Pin HC-49/USX Thru-Hole Bulk", ESR (Equivalent Series Resistance)=80R, Frequency=8MHz, Frequency Stability=50ppm, Frequency Tolerance=30ppm, Load Capacitance=20pF, Manufacturer="ECS International", Max Operating Temperature=70°C, Min Operating Temperature=-10°C, Package Quantity=200, Category=Oscillators, ComponentLink1Description=https://datasheet.ciiva.com/853/hc-49usx-853353.pdf?src-supplier=Digi-Key, ComponentLink1URL=https://datasheet.ciiva.com/853/hc-49usx-853353.pdf?src-supplier=Digi-Key, Height=3.5mm, Lead Free="Lead Free", Length=11.35mm, Manufacturer Part Number=ECS-80-20-4X, Mount="Through Hole", Number of Pins=49, Packaging=Bulk, Pricing 1="200=0.33350, 210=0.32430, 410=0.31510, 1000=0.30590, 2000=0.29670 (USD)", RoHS=Yes, RoHS Compliant=No, Series=HCS-49USX, Stock 1=5000, Supplier 1=Avnet, Supplier Part Number 1=ECS-80-20-4X, Termination=Radial, Tolerance=30ppm, Weight=0.019667oz, Width=4.65mm
Y2: library part XTAl_32.768_KHZ, "Crystal 0.032768MHz ±20ppm (Tol) 6pF Flexural 70000Ohm 2-Pin CSMD T/R", Case/Package=CSMD, ESR (Equivalent Series Resistance)=70kR, Frequency=32.768kHz, Frequency Tolerance=20ppm, Load Capacitance=6pF, Manufacturer=Abracon, Max Operating Temperature=85°C, Min Operating Temperature=-40°C, Operating Frequency="32.768 kHz", Package Quantity=3000, Supplier Part Number 1=13AC8084, Category=Crystals, ComponentLink1Description=https://datasheet.ciiva.com/23810/1700986-23810482.pdf?src-supplier=Newark, ComponentLink1URL=https://datasheet.ciiva.com/23810/1700986-23810482.pdf?src-supplier=Newark, ComponentLink2Description=https://datasheet.ciiva.com/15116/getdatasheetpartid-719871-15116767.pdf?src-supplier=Verical, ComponentLink2URL=https://datasheet.ciiva.com/15116/getdatasheetpartid-719871-15116767.pdf?src-supplier=Verical, ComponentLink3Description=https://datasheet.ciiva.com/16216/abs07-16216664.pdf?src-supplier=Future+Electronics, ComponentLink3URL=https://datasheet.ciiva.com/16216/abs07-16216664.pdf?src-supplier=Future+Electronics, ComponentLink4Description=https://datasheet.ciiva.com/6733/abs07-6733371.pdf?src-supplier=Digi-Key, ComponentLink4URL=https://datasheet.ciiva.com/6733/abs07-6733371.pdf?src-supplier=Digi-Key, ComponentLink5Description=https://datasheet.ciiva.com/6733/abs07-6733372.pdf?src-supplier=Digi-Key, ComponentLink5URL=https://datasheet.ciiva.com/6733/abs07-6733372.pdf?src-supplier=Digi-Key, ComponentLink6Description=https://datasheet.ciiva.com/12387/abs07-11028-12387292.pdf?src-supplier=Mouser, ComponentLink6URL=https://datasheet.ciiva.com/12387/abs07-11028-12387292.pdf?src-supplier=Mouser, ComponentLink7Description=https://datasheet.ciiva.com/6733/abs07-6733373.pdf?src-supplier=Digi-Key, ComponentLink7URL=https://datasheet.ciiva.com/6733/abs07-6733373.pdf?src-supplier=Digi-Key, Depth=1.5mm, Height=0.035inch, Lead Free="Lead Free", Length=3.2mm, Manufacturer Part Number=ABS07-32.768KHZ-6-T, Mount="Surface Mount", Number of Pins=2, Packaging="Tape and Reel", Pricing 1="1=0.84600, 3000=0.84600 (USD)", Radiation Hardening=No, REACH SVHC="No SVHC", RoHS=Yes, RoHS Compliant=Yes, Series=ABS07, Series Resistance=70kR, Stock 1=12000, Supplier 1=Newark, Termination=SMD/SMT, Tolerance=20ppm, Width=0.061inch

## Via types
v1: diameter 0.508, hole 0.2, Top Layer to Bottom Layer, 93 vias
v2: diameter 0.711, hole 0.2, Top Layer to Bottom Layer, 80 vias
v3: diameter 0.6, hole 0.2, Top Layer to Bottom Layer, tented both sides, 37 vias
v4: diameter 0.6/0.6 (per signal layer), hole 0.2, Top Layer to Bottom Layer, tented both sides, 3 vias
v5: diameter 0.6, hole 0.2, Top Layer to Bottom Layer, 2 vias

## Nets (pads, with @x,y where several pads share a name; then routed paths per layer and width w, separated by ;. In a path a pad name is that pad's centre, name@x,y a point inside that pad or via, vN(x,y) a via of type N, cw(c..) or ccw(c..) an arc to the next point about the centre after c; other vN are vias at no path point)
+3V3: C1.1 C2.1 C3.1 C4.1 C7.2 D1.2 D2.2 J2.1 J3.1 J3.18 J4.1 J5.1 J5.6 R10.2 U1.1 U1.9 U1.24 U1.36 U1.48 U2.4 U2.5 | length 181.8
  Top Layer w0.3: J3.1 2.54,5.69 D2.2 7.35,10.5 v3(10.5,10.5) ; J2.1 2.032,19.812 2.032,15.35 J4.1 2.142,15.35 D1.2 5.085,13.435 v3(5.085,13.373) ; v3(12.75,7) 12.797,7.047 17.297,7.047 v3(17.344,7.094) ; v3(19.915,10.165) 20.731,10.165 20.815,10.25 21.419,10.25 21.669,10.5 v3(21.75,10.5) 22.625,9.625 25.977,9.625 U1.1 24.856,11.383 22.743,11.383 22.126,12 20,12 18.874,13.126 18.874,14.124 19.75,15 22.25,15 24.867,12.383 25.977,12.383 U1.48 ; U1.9 29.651,7.642 30.061,7.642 30.419,8 31.75,8 v3(32.75,9) ; U1.36 32.624,16.272 32.624,16.795 32.25,17.169 v3(32.25,17.25) 32.288,17.25 32.799,17.761 33.011,17.761 33.837,18.587 34.335,18.587 34.335,20.921 35.084,21.67 51.276,21.67 51.95,20.996 51.95,19.644 50.806,18.5 49.25,18.5 48.25,17.5 45,17.5 43.185,15.685 43.185,15.185 v3(42.5,14.5) 44.25,14.5 v3(44.5,14.25) ; v3(34.985,10.789) 35.043,10.732 35.407,10.732 U1.24 ; v3(37.564,10.614) 37.622,10.557 37.622,10.005 38.129,9.498 38.667,9.498 38.669,9.5 39.507,9.5 39.642,9.635 39.841,9.635 41.148,8.328 J5.6 J5.1 41.148,5.388 41.798,4.738 42.584,4.738 43.084,4.238 44.222,4.238 J3.18@45.72,2.74 ; J3.18 J3.18@45.72,2.74 ; v3(48,6.75) 48,5.02 J3.18@45.72,2.74
  Bottom Layer w0.3: v3(5.085,13.373) 5.085,12.085 4.75,11.75 11.15,11.75 11.4,11.5 11.6,11.5 C2.1@11.9,11.2 ; v3(10.5,10.5) 11.6,10.5 C2.1@11.823,10.723 ; C4.1 C4.1@11.8,5.766 ; C1.1 11.9,13.7 C2.1@11.9,11.2 ; v3(12.75,7) 12.693,6.943 12.693,6.793 11.8,5.9 C4.1@11.8,5.766 ; v3(17.344,7.094) 19.17,8.92 19.17,9.42 v3(19.915,10.165) ; v3(21.75,10.5) 22.484,9.766 23.502,9.766 24.023,9.245 24.023,7.955 25.378,6.6 26.81,6.6 26.96,6.45 U2.5 U2.4 28.23,6.45 29.6,7.82 30.239,7.82 30.419,8 v3(30.5,8) ; v3(32.25,17.25) 32.331,17.25 32.561,17.48 33.228,17.48 C7.2 ; v3(32.75,9) 32.807,9.057 33.327,9.057 34.985,10.716 v3(34.985,10.789) ; v3@34.983,10.766 37.153,10.766 37.247,10.671 37.507,10.671 v3(37.564,10.614) ; R10.2 38.739,14.921 38.739,14.619 39.237,14.121 40.641,14.121 41.02,14.5 v3(42.5,14.5) ; v3(44.5,14.25) 45,14.25 46,13.25 46.207,13.25 46.469,13.25 47.4,12.319 47.4,11.731 47.019,11.35 46.911,11.35 46.911,9.978 48,8.889 v3(48,6.75) ; C4.1@11.8,5.766 11.8,8.477 C3.1 C2.1@11.823,10.723 ; C2.1@11.823,10.723 11.823,10.923 C2.1 C2.1@11.9,11.2
+5V: C5.1 C6.2 J1.1 J2.3 R5.2 U2.1 U2.2 | length 85.3
  Top Layer w0.3: J1.1 49.7,11.2 49.75,11.15 v3(49.75,10.75)
  Bottom Layer w0.3: J2.3 7.62,20.12 10.026,17.714 R5.2 30.922,17.714 C6.2 31.288,17.948 32.101,17.948 32.733,18.58 35.129,18.58 35.868,17.841 C5.1 37.168,17.841 37.403,18.076 37.403,18.545 37.637,18.78 41.87,18.78 45.531,15.119 45.531,14.895 49.09,11.336 49.164,11.336 v3(49.75,10.75) 48.748,9.748 48.748,6.579 48.269,6.1 47.731,6.1 47.35,6.481 47.35,7.424 47.378,7.452 47.378,8.804 46.704,9.478 45.752,9.478 45.078,8.804 45.078,5.152 43.99,4.064 42.878,4.064 41.997,3.183 41.997,2.071 41.116,1.19 40.164,1.19 39.25,2.104 39.25,3.216 38.506,3.961 36.844,3.961 35.797,5.008 35.797,5.953 35,6.75 34.21,6.75 34.06,6.6 32.19,6.6 32.04,6.45 U2.1 U2.2
BOOT0: J5.2 R2.2 | length 6.2
  Bottom Layer w0.3: R2.2 38.7,5.2 39.662,4.238 42.345,4.238 43.688,5.581 J5.2
BOOT1: J5.5 R8.2 | length 6.6
  Bottom Layer w0.3: R8.2 38.7,8.05 40.128,9.478 41.624,9.478 41.852,9.25 42.766,9.25 43.688,8.328 J5.5
D_N: R1.2 U1.32 | length 12.8
  Top Layer w0.203: v4(33.625,12.625) 33.625,12.662 33.345,12.942 33.345,13.155 32.825,13.675 33.067,13.917 33.69,14.54 U1.32
  Bottom Layer w0.203: v4(33.625,12.625) 33.695,12.555 33.695,12.246 33.962,11.979 42.383,11.979 42.502,12.098 42.502,12.502 R1.2
D_P: R3.2 R5.1 U1.33 | length 20.4
  Top Layer w0.203: 32.674,12.576 32.887,12.789 32.887,12.966 32.368,13.486 32.368,13.864 32.61,14.107 33.367,14.863 U1.33
  Bottom Layer w0.203: R5.1 28.748,15.814 29.761,14.801 31.449,14.801 32,14.25 32,14 32.25,13.75 32.25,13 32.674,12.576 32.674,12.326 v4(32.75,12.25) 32.826,12.174 33.12,12.174 33.773,11.521 42.383,11.521 42.502,11.402 42.502,10.998 R3.2
GND: C1.2 C2.2 C3.2 C4.2 C5.2 C6.1 C7.1 C8.1 C9.1 C10.1 C11.1 C12.1 J1.4 J1.5 J1.6 J1.7 J1.8 J1.9 J1.10 J1.11 J2.2 J3.19 J3.20 J4.4 J5.3 J5.4 R6.2 SW1.1 SW1.2 U1.8 U1.23 U1.35 U1.47 U2.3 U2.6 | length 15.4
  Top Layer w0.3: U1.8 v5@29.828,8.526 ; 29.627,10.496 30.387,10.496 30.635,10.248 ; v5(29.876,8.526) v5@29.828,8.526 ; v5(30.25,10) 30.387,10 30.635,10.248 ; 30.353,8.763 30.313,8.723 30.025,8.723 v5@29.828,8.526 ; 31,10 30.883,10 30.635,10.248 ; 34.917,10.143 34.921,10.139 35.292,10.139 U1.23 36.374,9.057 36.943,9.057 v4(37,9) ; v3(38.398,10.148) 38.45,10.2 39.5,10.2 SW1.2
  Bottom Layer w0.3: C8.1 26.869,14.732 27.261,15.124 27.261,16.122 27.653,16.514 29.243,16.514 29.565,16.191 29.565,16.071 29.888,15.748 C6.1
  other v1: 0.45,1.51 1.085,2.78 0.45,4.05 1.72,4.05 4.26,4.05 24.58,4.05 48.71,4.05 49.98,4.05 51.25,4.05 1.085,5.32 3.625,5.32 4.895,5.32 6.165,5.32 7.435,5.32 9.975,5.32 49.345,5.32 50.615,5.32 51.885,5.32 0.45,6.59 5.53,6.59 6.8,6.59 8.07,6.59 10.61,6.59 49.98,6.59 51.25,6.59 3.625,7.86 50.615,7.86 51.885,7.86 0.45,9.13 2.99,9.13 4.26,9.13 3.625,10.4 4.895,10.4 41.725,10.4 45.535,10.4 0.45,11.67 43.63,11.67 3.625,12.94 41.725,12.94 0.45,14.21 4.26,14.21 9.34,14.21 10.61,14.21 48.075,15.48 0.45,16.75 2.99,16.75 4.26,16.75 5.53,16.75 6.8,16.75 8.07,16.75 9.34,16.75 10.61,16.75 15.69,16.75 33.47,16.75 34.74,16.75 46.17,16.75 47.44,16.75 1.085,18.02 3.625,18.02 4.895,18.02 6.165,18.02 7.435,18.02 8.705,18.02 51.885,18.02 0.45,19.29 1.085,20.56 0.45,21.83 1.72,21.83 2.99,21.83 4.26,21.83 5.53,21.83 6.8,21.83 8.07,21.83 9.34,21.83 10.61,21.83 11.88,21.83 13.15,21.83 14.42,21.83 15.69,21.83 16.96,21.83 18.23,21.83 19.5,21.83 20.77,21.83 22.04,21.83 23.31,21.83 24.58,21.83 25.85,21.83 27.12,21.83 28.39,21.83 29.66,21.83 30.93,21.83 32.2,21.83 33.47,21.83
  other v2: 0.565,0.65 1.835,0.65 3.105,0.65 4.375,0.65 5.645,0.65 6.915,0.65 8.185,0.65 9.455,0.65 10.725,0.65 11.995,0.65 13.265,0.65 14.535,0.65 15.805,0.65 17.075,0.65 18.345,0.65 19.615,0.65 20.885,0.65 22.155,0.65 23.425,0.65 24.695,0.65 25.965,0.65 27.235,0.65 28.505,0.65 34.855,0.65 36.125,0.65 37.395,0.65 38.665,0.65 42.475,0.65 43.745,0.65 45.015,0.65 46.285,0.65 47.555,0.65 48.825,0.65 50.095,0.65 51.365,0.65 0.565,3.19 1.2,4.46 3.74,4.46 5.01,4.46 49.46,4.46 50.73,4.46 52,4.46 0.565,5.73 4.375,5.73 5.645,5.73 6.915,5.73 8.185,5.73 10.725,5.73 50.095,5.73 51.365,5.73 5.01,7 50.73,7 52,7 0.565,8.27 3.74,9.54 5.01,9.54 0.565,10.81 0.565,13.35 10.725,13.35 3.74,14.62 5.01,14.62 8.185,15.89 10.725,15.89 47.555,15.89 1.2,17.16 3.74,17.16 5.01,17.16 6.28,17.16 7.55,17.16 8.82,17.16 49.46,17.16 50.73,17.16 52,17.16 0.565,18.43 3.105,18.43 4.375,18.43 5.645,18.43 6.915,18.43 8.185,18.43 0.565,20.97
NetD1_1: D1.1 R6.1 | length 3.4
  Top Layer w0.3: D1.1 7.993,14.243 8.428,14.243 v3(8.486,14.3)
  Bottom Layer w0.3: v3(8.486,14.3) 8.543,14.243 8.543,13.907 9.1,13.35 R6.1
NetD2_1: D2.1 R7.2 | length 3.4
  Top Layer w0.3: D2.1 7.736,7.95 v3(8.486,8.7)
  Bottom Layer w0.3: v3(8.486,8.7) 8.543,8.757 8.543,9.093 9.1,9.65 R7.2
NetJ1_2: J1.2 R1.1 | length 5
  Top Layer w0.3: v3(46.75,12.05) 46.8,12 47.5,12 47.65,11.85 J1.2
  Bottom Layer w0.3: R1.1 46.05,12.75 v3(46.75,12.05)
NetJ1_3: J1.3 R3.1 | length 5.6
  Top Layer w0.3: v3(45.75,11.75) 45.807,11.807 45.807,12.027 46.481,12.7 47.507,12.7 47.707,12.5 J1.3
  Bottom Layer w0.3: R3.1 44.75,10.75 v3(45.75,11.75)
NetR2_1: R2.1 U1.44 | length 15.3
  Top Layer w0.3: U1.44 28.237,12.952 30.539,12.952 31.241,12.25 31.241,11.915 31.963,11.192 v3(31.963,11.118)
  Bottom Layer w0.3: v3(31.963,11.118) 31.963,10.3 31.881,10.218 31.881,9.757 31.6,9.476 31.6,8.524 31.881,8.243 31.881,7.426 32.056,7.25 35.35,7.25 36.8,5.8 R2.1
NetR8_1: R8.1 U1.20 | length 10.4
  Top Layer w0.3: v3(33.223,9.873) 33.225,9.873 33.754,9.344 33.967,9.344 U1.20
  Bottom Layer w0.3: v3(33.223,9.873) 33.166,9.816 32.647,9.816 32.1,9.269 32.1,8.731 32.481,8.35 33.019,8.35 33.169,8.5 33.477,8.5 34.639,9.662 34.888,9.662 36.3,8.25 36.6,8.25 36.8,8.05 R8.1
NRST: C11.2 J3.17 R10.1 SW1.3 SW1.4 U1.7 | length 46.5
  Top Layer w0.3: U1.7 29.226,8.632 29.237,8.642 29.237,8.806 29.797,9.367 29.964,9.367 29.981,9.35 30.519,9.35 30.536,9.367 30.603,9.367 30.857,9.113 31.477,9.113 33.765,11.4 34.378,11.4 34.417,11.439 35.406,11.439 35.661,11.185 ; J3.17 43.18,2.74 41.682,4.238 40.012,4.238 39.25,5 39.25,6.25 38.15,7.35 38.15,8.769 37.269,9.65 37.196,9.65 35.661,11.185 ; v3(43.835,15.415) 46.735,15.415 47.25,14.9 SW1.3 44.919,13.75 44.769,13.6 44.231,13.6 44.081,13.75 SW1.4 39.95,13.75 37.464,11.264 36.638,11.264 36.558,11.185 35.661,11.185
  Bottom Layer w0.3: R10.1 39.939,17.587 C11.2 40.132,17.58 40.432,17.28 41.97,17.28 v3(43.835,15.415)
PA0: J3.5 U1.10 | length 19
  Top Layer w0.3: J3.5 13.149,2.989 13.862,2.989 14.874,4 16.583,4 18.224,5.64 19.143,5.64 19.353,5.85 20.643,5.85 21.543,6.75 27.536,6.75 28.051,6.235 28.951,6.235 U1.10
PA1: J3.6 U1.11 | length 16.6
  Top Layer w0.3: J3.6 15.689,2.989 16.402,2.989 18.554,5.14 19.35,5.14 19.46,5.25 20.75,5.25 21.75,6.25 27.328,6.25 27.843,5.735 29.158,5.735 U1.11
PA2: J3.7 U1.12 | length 14.4
  Top Layer w0.3: J3.7 17.78,2.74 19.54,4.5 21,4.5 22.25,5.75 27.121,5.75 27.636,5.235 29.365,5.235 U1.12
PA3: J3.8 U1.13 | length 14.2
  Top Layer w0.3: J3.8 20.32,2.741 22.829,5.25 26.914,5.25 27.429,4.735 29.572,4.735 31.21,6.373 31.988,6.373 U1.13
PA4: J3.9 U1.14 | length 14.6
  Top Layer w0.3: J3.9 22.86,4.36 23.25,4.75 26.602,4.75 27.117,4.235 29.779,4.235 31.247,5.702 31.951,5.702 32.479,5.174 32.691,5.174 32.73,5.135 33.186,5.591 33.186,5.881 U1.14
PA5: J3.10 U1.15 | length 12.2
  Top Layer w0.3: J3.10@25.4,2.34 J3.10 ; U1.15 33.75,6.025 v3(33.75,5)
  Bottom Layer w0.3: J3.10 25.4,2.74 26.66,4 33.574,4 33.75,4.176 v3(33.75,5)
PA6: J3.11 U1.16 | length 13.5
  Top Layer w0.3: J3.11 J3.11@28,2.6 ; U1.16 34.443,6.039 34.443,5.807 v3(34.5,5.75)
  Bottom Layer w0.3: J3.11 27.94,2.34 29.09,1.19 34.074,1.19 34.25,1.366 34.25,3.5 34.5,3.75 v3(34.5,5.75)
PA7: J3.12 U1.17 | length 8.9
  Top Layer w0.3: J3.12 31.694,2.54 31.87,2.716 31.87,3.216 32.904,4.25 34.203,4.25 35.15,5.197 35.15,6.039 U1.17
PA8: J2.16 U1.29 | length 10.2
  Top Layer w0.3: U1.29 36.56,15.258 36.56,17.56 37.936,18.936 39.456,18.936 40.64,20.12 J2.16
PA9: J2.15 U1.30 | length 8
  Top Layer w0.3: U1.30 36.06,15.466 36.06,18.08 38.1,20.12 J2.15
PA10: J2.14 U1.31 | length 6.7
  Top Layer w0.3: U1.31 35.56,15.673 J2.14
PA11: J2.13
PA12: J2.12
PA15: J2.11 U1.38 | length 7.5
  Top Layer w0.3: J2.11 27.491,19.871 26.871,19.871 26.25,19.25 26.25,18.75 28.14,16.86 28.572,16.86 U1.38
PB0: J3.13 U1.18 | length 7.2
  Top Layer w0.3: J3.13 33.02,2.74 33.921,3.641 34.301,3.641 35.65,4.99 35.65,6.246 U1.18
PB1: J3.14 U1.19 | length 6.6
  Top Layer w0.3: U1.19 36.15,6.453 36.15,4.65 35.809,4.309 35.809,2.789 J3.14
PB3: J2.10 U1.39 | length 7
  Top Layer w0.3: J2.10 25.4,18.85 27.89,16.36 28.365,16.36 29.159,15.565 U1.39
PB4: J2.9 U1.40 | length 8.6
  Top Layer w0.3: J2.9 22.86,20.12 23.98,19 24.5,19 27.64,15.86 28.158,15.86 28.806,15.212 U1.40
PB5: J2.8 U1.41 | length 10.8
  Top Layer w0.3: J2.8 22.14,18.5 24.25,18.5 27.39,15.36 27.951,15.36 28.452,14.858 U1.41
PB6: J2.7 U1.42 | length 13.2
  Top Layer w0.3: J2.7 20.1,18 24.043,18 27.183,14.86 27.744,14.86 U1.42
PB7: J2.6 U1.43 | length 15.6
  Top Layer w0.3: J2.6 15.24,20.12 16.86,18.5 18.75,18.5 19.75,17.5 23.833,17.5 26.974,14.36 27.537,14.36 U1.43
PB8: J2.5 U1.45 | length 17.8
  Top Layer w0.3: J2.5 12.7,20.12 14.07,18.75 15.75,18.75 16.75,17.75 18.75,17.75 19.5,17 23.577,17 26.829,13.748 26.829,13.652 U1.45
PB9: J2.4 U1.46 | length 20.1
  Top Layer w0.3: J2.4 10.16,20.12 12.28,18 15.5,18 16.5,17 18.75,17 19.25,16.5 23.37,16.5 26.329,13.541 26.329,13.445 26.363,13.411 U1.46
PB10: J3.15 U1.21 | length 7.6
  Top Layer w0.3: U1.21 38.1,5.917 J3.15